# Altium PCB m_airconditionerV2.0_PCB.PcbDoc
Units mm, origin at the board's own origin, x right, y up, seen from the top; angles counter-clockwise.
Board outline 200.13 x 180.13 mm, 2 copper layers (Top Layer, Bottom Layer); 81 components, 122 nets, 456 pads, 39 vias.
Unrouted connection lines stored in the file: 132.
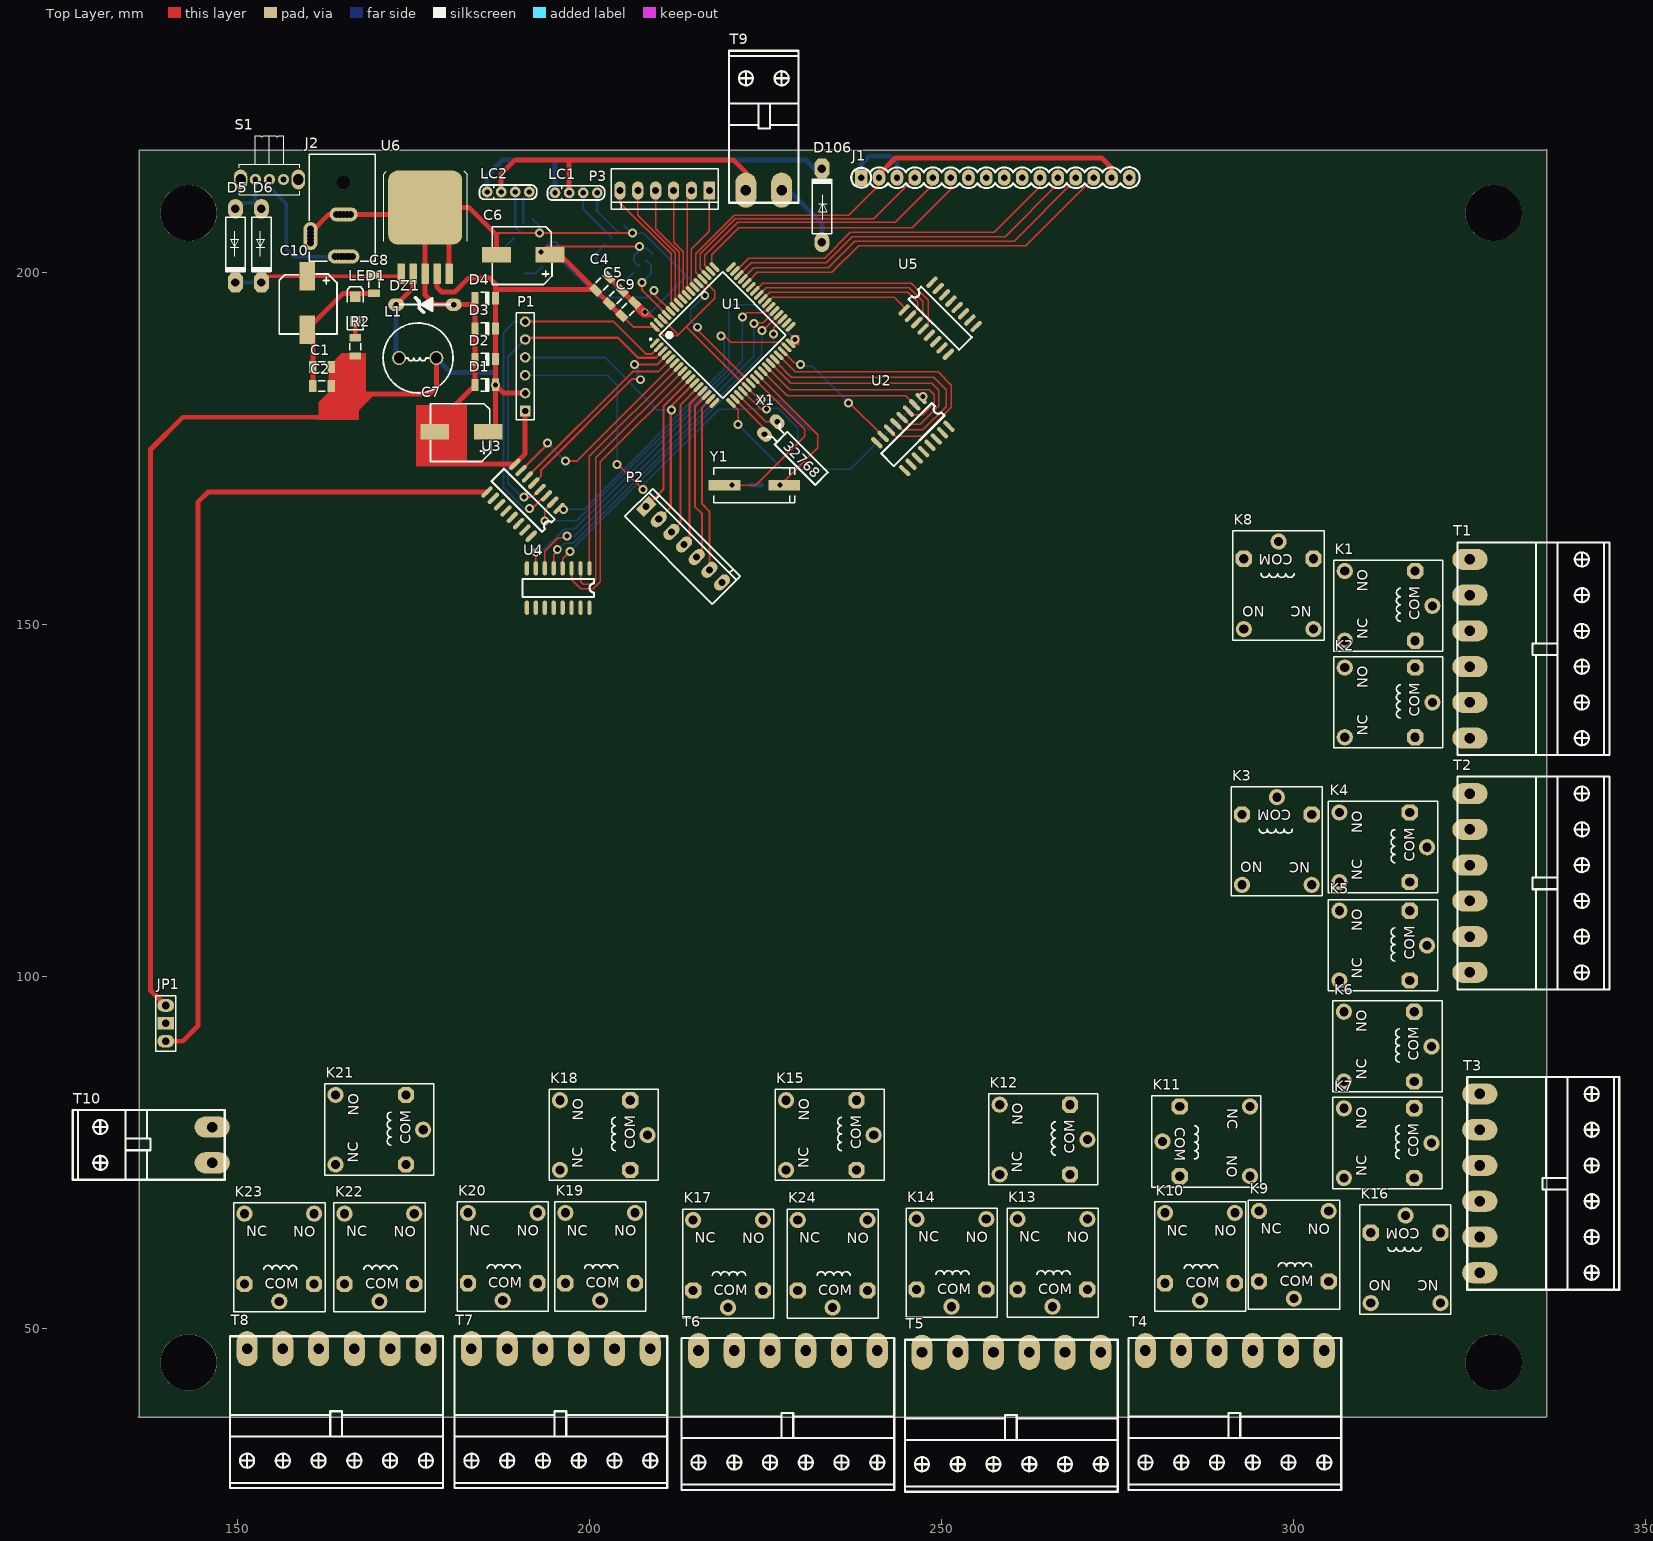
[diagram p0: Top Layer view]
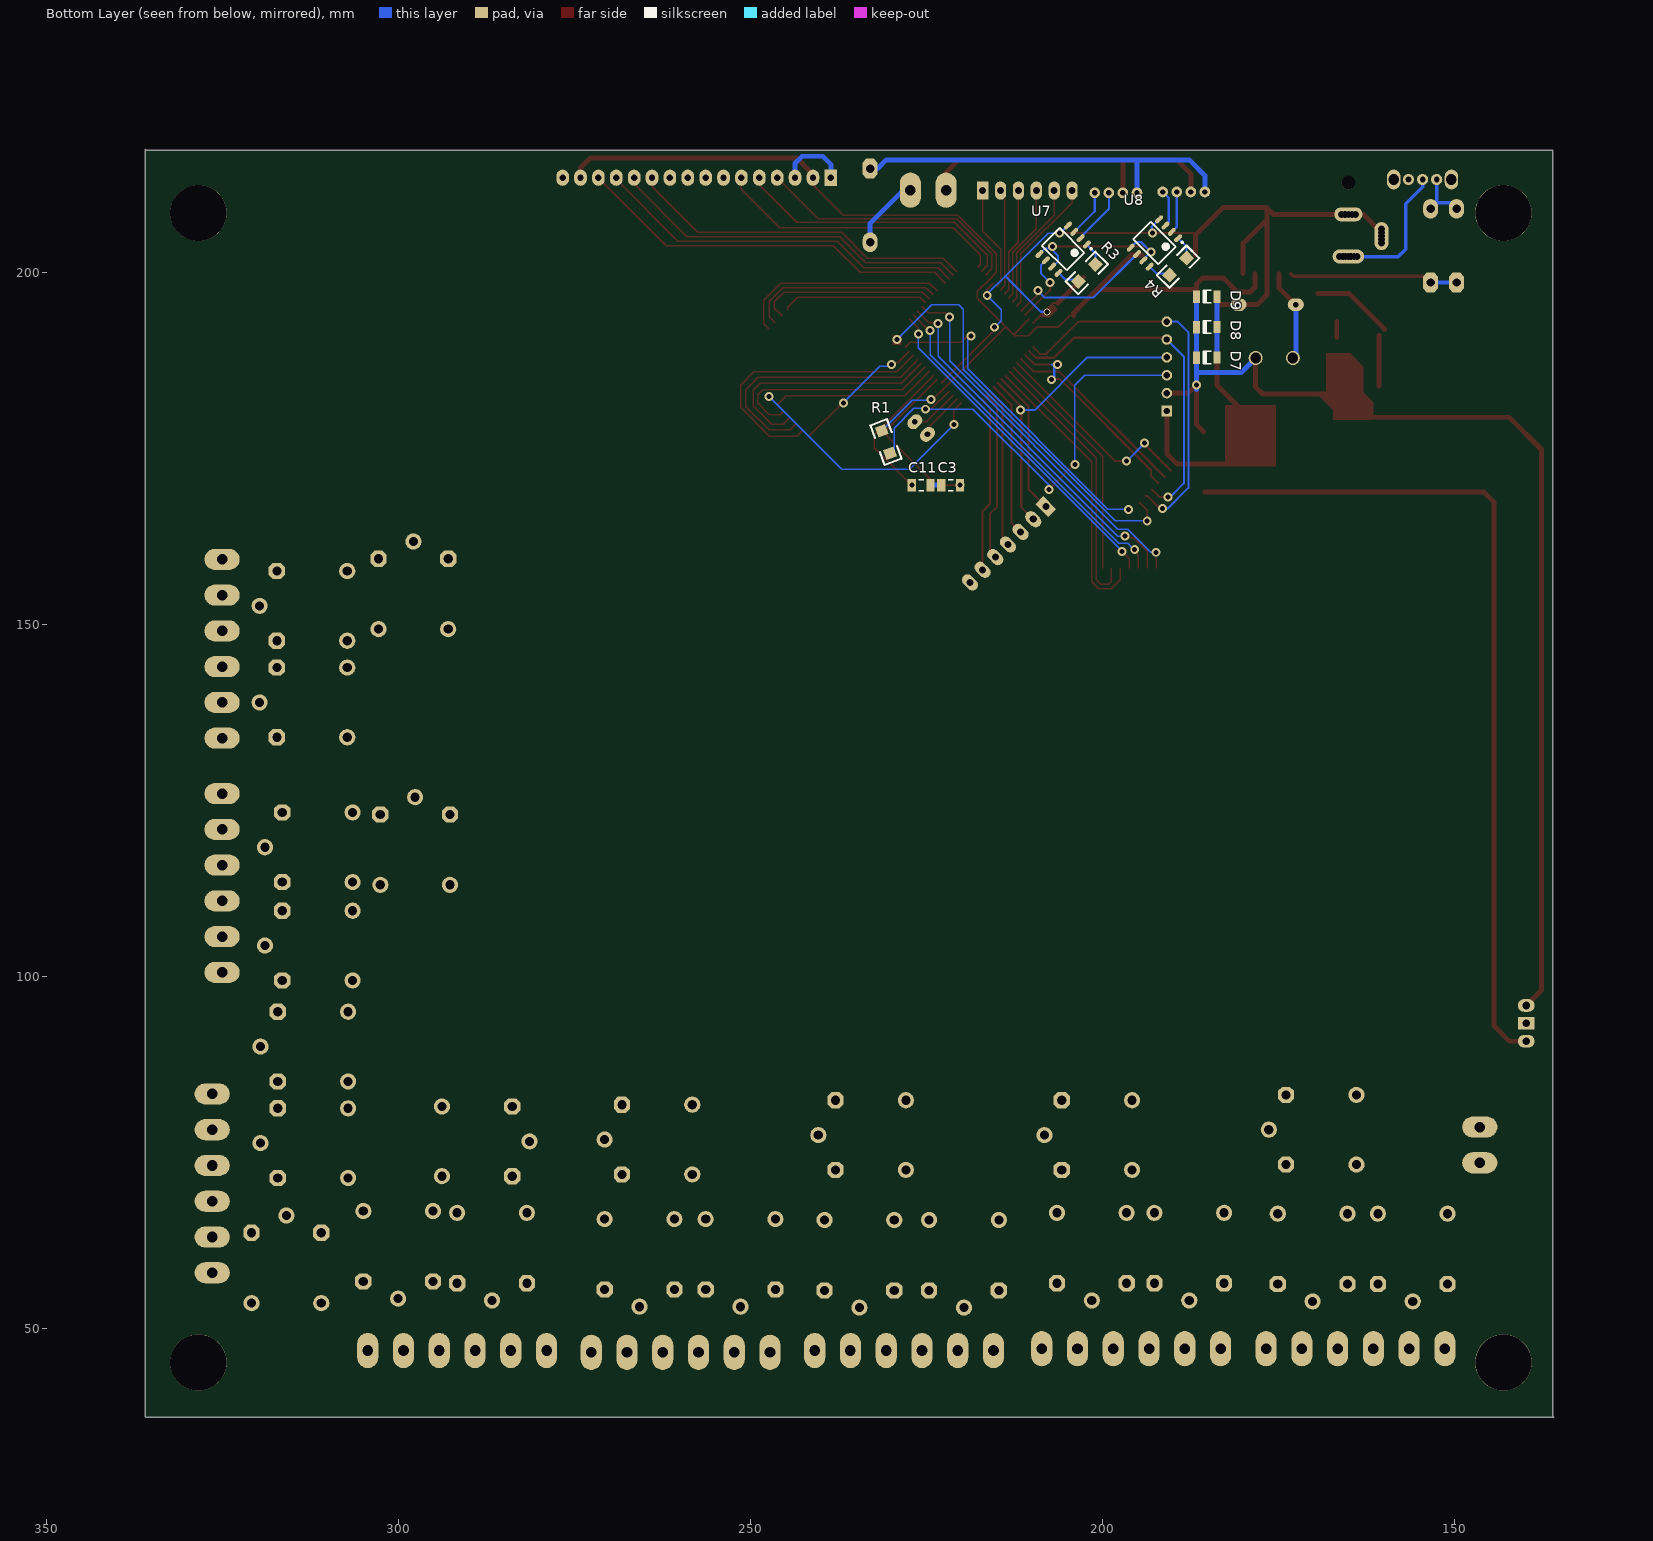
[diagram p1: Bottom Layer view, seen from below]

## Layer stack, top to bottom
Top Solder: solder mask 0.0102, Solder Resist, Dk 3.5
Top Layer: signal copper 0.0356
Dielectric 1: dielectric 0.32, FR-4, Dk 4.8
Bottom Layer: signal copper 0.0356
Bottom Solder: solder mask 0.0102, Solder Resist, Dk 3.5

## Board outline
136.031,37.504 135.897,37.37 335.897,37.37 336.031,37.504 336.031,217.504 335.897,217.37 136.031,217.37

## Design rules (kind name [scope] priority, off if disabled: settings)
Clearance [All] p1: gap=0.254
PolygonConnect [All] p1: connectstyle=Relief reliefconductorwidth=0.254 reliefentries=4 polygonreliefangle="90 Angle" airgapwidth=0.254
RoutingVias [All] p1: holewidth=0.711 width=1.27 viastyle="Through Hole" minholewidth=0.711 minwidth=1.27 maxholewidth=0.711 maxwidth=1.27
SolderMaskExpansion [All] p1: expansion=0.102
Width [All] p1: maxlimit=0.7 minlimit=0.2 preferedwidth=0.5
29 further rules are at their usual default settings.

## Components (designator, comment, footprint, x,y, rotation, side; value= is the part's Value field where it differs from the comment)
C1 "100nF" SMD_CAP_1206 163.322,186.563 r180 top
C2 "150nf" SMD_CAP_1206 163.322,183.896 r180 top
C3 "100nF" "CAP 1206 (3216X15L)" 221.615,169.799 r180 bottom
C4 "100nF" SMD_CAP_1206 200.914,197.485 r45 top
C5 "100nF" SMD_CAP_1206 202.819,195.58 r45 top
C6 "Capacitor Polarized" "Electrolytic Capacitor SMD Dia-8" 194.31,202.819 r180 top
C7 "Capacitor Polarized" "Electrolytic Capacitor SMD Dia-8" 185.547,177.673 r180 top
C8 "100nF" SMD_CAP_1206 169.418,199.644 r270 top
C9 "1000uF" SMD_CAP_1206 204.597,193.871 r45 top
C10 "Capacitor Polarized" "Electrolytic Capacitor SMD Dia-8" 159.639,199.39 r270 top
C11 "100nF" "CAP 1206 (3216X15L)" 225.806,169.799 r0 bottom
D1 "Diode Zener SMD" DIOMELF3615N 185.166,184.023 r180 top
D2 "Diode Zener SMD" DIOMELF3615N 185.166,187.706 r180 top
D3 "Diode Zener SMD" DIOMELF3615N 185.166,192.024 r180 top
D4 "Diode Zener SMD" DIOMELF3615N 185.166,196.342 r180 top
D5 "1N4007" My_DO-41 149.987,198.374 r90 top
D6 "1N4007" My_DO-41 153.67,198.374 r90 top
D7 "Diode Zener SMD" DIOMELF3615N 185.166,187.96 r180 bottom
D8 "Diode Zener SMD" DIOMELF3615N 185.166,192.278 r180 bottom
D9 "Diode Zener SMD" DIOMELF3615N 185.166,196.596 r180 bottom
D106 "1N4007" My_DO-41 232.791,215.011 r270 top
DZ1 "1n5822" ZENER 180.721,195.453 r180 top
J1 "SIP16" SIP16 238.633,213.487 r0 top
J2 "Power Jack" "Power Jack" 165.1,216.789 r270 top
JP1 "Jumper" "jumper selector" 139.827,90.805 r90 top
K1 "Relay" "Relay 15.40x12.10x13.10" 319.786,152.654 r90 top
K2 "Relay" "Relay 15.40x12.10x13.10" 319.786,138.938 r90 top
K3 "Relay" "Relay 15.40x12.10x13.10" 297.688,125.476 r180 top
K4 "Relay" "Relay 15.40x12.10x13.10" 319.024,118.364 r90 top
K5 "Relay" "Relay 15.40x12.10x13.10" 319.024,104.394 r90 top
K6 "Relay" "Relay 15.40x12.10x13.10" 319.659,90.043 r90 top
K7 "Relay" "Relay 15.40x12.10x13.10" 319.659,76.327 r90 top
K8 "Relay" "Relay 15.40x12.10x13.10" 297.942,161.798 r180 top
K9 "Relay" "Relay 15.40x12.10x13.10" 300.101,54.229 r0 top
K10 "Relay" "Relay 15.40x12.10x13.10" 286.766,53.975 r0 top
K11 "Relay" "Relay 15.40x12.10x13.10" 281.432,76.581 r270 top
K12 "Relay" "Relay 15.40x12.10x13.10" 270.764,76.835 r90 top
K13 "Relay" "Relay 15.40x12.10x13.10" 265.811,53.086 r0 top
K14 "Relay" "Relay 15.40x12.10x13.10" 251.46,53.086 r0 top
K15 "Relay" "Relay 15.40x12.10x13.10" 240.411,77.47 r90 top
K16 "Relay" "Relay 15.40x12.10x13.10" 315.976,66.04 r180 top
K17 "Relay" "Relay 15.40x12.10x13.10" 219.71,52.959 r0 top
K18 "Relay" "Relay 15.40x12.10x13.10" 208.28,77.47 r90 top
K19 "Relay" "Relay 15.40x12.10x13.10" 201.549,53.975 r0 top
K20 "Relay" "Relay 15.40x12.10x13.10" 187.706,53.975 r0 top
K21 "Relay" "Relay 15.40x12.10x13.10" 176.403,78.232 r90 top
K22 "Relay" "Relay 15.40x12.10x13.10" 170.18,53.848 r0 top
K23 "Relay" "Relay 15.40x12.10x13.10" 155.956,53.848 r0 top
K24 "Relay" "Relay 15.40x12.10x13.10" 234.569,52.959 r0 top
L1 "100uh" "General 10x12(200m) Inductor" 171.577,187.071 r270 top
LC1 "LoadCell-SUP" LoadCell-SUP 199.136,210.439 r0 top
LC2 "LoadCell-SUP" LoadCell-SUP 189.484,210.566 r0 top
LED1 "Red" "LED SMD 1206" 166.751,194.818 r90 top
P1 "Programmer" HDR1X6 190.881,180.34 r90 top
P2 "LHWR" "Polarized Header 7" 213.741,161.671 r315 top
P3 "LHWR" "Polarized Header 6" 210.693,211.455 r180 top
R1 "RES" 1206 231.394,177.546 r250 bottom
R2 "125" "RES 1206 (3216X08L)" 166.751,190.754 r270 top
R3 "RES" 1206 201.041,201.168 r315 bottom
R4 "RES" 1206 188.087,202.057 r315 bottom
S1 "Switch SPDT_Subminiator" "SPDT Subminiator" 154.559,213.233 r0 top
T1 "PHONIX6" PHONIX6 325.12,159.258 r270 top
T2 "PHONIX6" PHONIX6 325.12,125.984 r270 top
T3 "PHONIX6" PHONIX6 326.517,83.312 r270 top
T4 "PHONIX6" PHONIX6 304.419,46.863 r180 top
T5 "PHONIX6" PHONIX6 272.669,46.609 r180 top
T6 "PHONIX6" PHONIX6 240.919,46.863 r180 top
T7 "PHONIX6" PHONIX6 208.661,47.117 r180 top
T8 "PHONIX6" PHONIX6 176.784,47.117 r180 top
T9 "PHONIX2" PHONIX2 227.33,211.709 r0 top
T10 "PHONIX2" PHONIX2 146.431,78.613 r90 top
U1 "ATmega64-16AC" 64A_N 218.948,191.135 r45 top
U2 "ULN2003" SO-16 247.142,182.118 r315 top
U3 "ULN2003" SO-16 195.707,166.497 r225 top
U4 "ULN2003" SO-16 200.025,157.988 r270 top
U5 "ULN2003" SO-16 244.729,194.691 r45 top
U6 "Adjustable" TO-263-5 176.657,205.867 r0 top
U7 "*AD604" AD620-Soic 205.613,203.327 r315 bottom
U8 "*AD604" AD620-Soic 192.659,204.216 r315 bottom
X1 "XTAL" XTAL2 226.695,178.816 r225 top
Y1 "11.0592 MHz" "Crystal SMD" 224.028,169.799 r180 top

## Footprints (in the part's own frame and the unit in brackets; to place one, negate y for a bottom-side part, rotate by r counter-clockwise, add the part's x,y. Pads: shape width x height; smd on the part's side, far side on the other; paste and mask are expansions set on the pad)
64A_N [mm] "Thin QFP, 64-Leads, Body 14x14mm, Pitch 0.8mm, IPC Medium Density"
  oval 1.75x0.55 smd: 1(-7.65,6) 2(-7.65,5.2) 3(-7.65,4.4) 4(-7.65,3.6) 5(-7.65,2.8) 6(-7.65,2) 7(-7.65,1.2) 8(-7.65,0.4) 9(-7.65,-0.4) 10(-7.65,-1.2) 11(-7.65,-2) 12(-7.65,-2.8) 13(-7.65,-3.6) 14(-7.65,-4.4) 15(-7.65,-5.2) 16(-7.65,-6) 33(7.65,-6) 34(7.65,-5.2) 35(7.65,-4.4) 36(7.65,-3.6) 37(7.65,-2.8) 38(7.65,-2) 39(7.65,-1.2) 40(7.65,-0.4) 41(7.65,0.4) 42(7.65,1.2) 43(7.65,2) 44(7.65,2.8) 45(7.65,3.6) 46(7.65,4.4) 47(7.65,5.2) 48(7.65,6)
  oval 0.55x1.75 smd: 17(-6,-7.65) 18(-5.2,-7.65) 19(-4.4,-7.65) 20(-3.6,-7.65) 21(-2.8,-7.65) 22(-2,-7.65) 23(-1.2,-7.65) 24(-0.4,-7.65) 25(0.4,-7.65) 26(1.2,-7.65) 27(2,-7.65) 28(2.8,-7.65) 29(3.6,-7.65) 30(4.4,-7.65) 31(5.2,-7.65) 32(6,-7.65) 49(6,7.65) 50(5.2,7.65) 51(4.4,7.65) 52(3.6,7.65) 53(2.8,7.65) 54(2,7.65) 55(1.2,7.65) 56(0.4,7.65) 57(-0.4,7.65) 58(-1.2,7.65) 59(-2,7.65) 60(-2.8,7.65) 61(-3.6,7.65) 62(-4.4,7.65) 63(-5.2,7.65) 64(-6,7.65)
  silkscreen extent -7.77,-6.35 6.35,6.95, body extent -7,-7 7,7, height 1.2
1206 [mil]
  rect 60x60 smd: 1(0,0) 2(135,0)
  silkscreen extent -50,-50 185,50
AD620-Soic [mm] "SOIC, 8-Leads, Body 4.90x3.90mm, Pitch 1.27mm, IPC Medium Density"
  oval 1.35x0.6 smd: 1(-2.85,1.905) 2(-2.85,0.635) 3(-2.85,-0.635) 4(-2.85,-1.905) 5(2.85,-1.905) 6(2.85,-0.635) 7(2.85,0.635) 8(2.85,1.905)
  silkscreen extent -2.97,-2.5 1.77,2.88, body extent -2,-2.5 2,2.5, height 1.75
"CAP 1206 (3216X15L)" [mm] "Chip Capacitor, 2-Leads, Body 3.2x1.6mm, IPC High Density"
  rect 1.15x1.75 smd: 1(-1.325,0) 2(1.325,0)
  silkscreen extent -0.35,-0.77 0.35,0.77, body extent -1.6,-0.8 1.6,0.8, height 1
"Crystal SMD" [mm]
  rect 4.5x1.5 smd: 1(-3.683,0) 2(4.817,0)
  silkscreen extent -5.18,-2.5 6.32,2.5, body extent -5.64,-2.25 6.66,2.25, height 5.18
DIOMELF3615N [mm] "MELF Diode, 2-Leads, Body 3.6x1.5mm, IPC Medium Density"
  rect 1x1.75 smd: 1(-1.495,-0.03) 2(1.38,-0.005)
  silkscreen extent -0.55,-0.87 0.55,0.87, body extent -1.61,-0.83 1.54,0.67, height 1.45
"Electrolytic Capacitor SMD Dia-8" [mm] "470uf,6.3v,16v"
  rect 4.1x2.2 smd: 1(-0.1,0.3) 2(7.5,0.3)
  silkscreen extent -0.4,-3.7 8.1,4.5, body extent -0.6,-3.7 8.4,4.6, height 11.9
"General 10x12(200m) Inductor" [mm]
  round 2 hole 1.5: 0(-0.8,6.7) 1(-0.8,1.4)
  silkscreen extent -5.77,-0.87 4.17,9.06, body extent -5.87,-1 4.13,9, height 11.63
HDR1X6 [mm] "Connector; Header; 6 Position"
  rect 1.5x1.5 hole 0.9: 1(0,0)
  round 1.5 hole 0.9: 2(2.54,0) 3(5.08,0) 4(7.62,0) 5(10.16,0) 6(12.7,0)
  silkscreen extent -1.27,-1.27 13.97,1.27
"jumper selector" [mm]
  oval 1.8x2.4 hole 1.1: 1(0,0) 3(5.08,0)
  rect 1.8x2.4 hole 1.1: 2(2.54,0)
  silkscreen extent -1.4,-1.4 6.48,1.4, body extent -1.24,-1.27 6.38,1.27, height 10.16
"LED SMD 1206" [mm]
  rect 1.5x1.5 smd: 1(-1.75,0) 2(1.75,0)
  silkscreen extent -2.9,-1.15 3.2,1.15, body extent -1.65,-0.76 1.65,0.69, height 1.36
LoadCell-SUP [mil]
  round 60 hole 30: 1(-157.48,35.43) 2(-78.74,35.43) 3(0,35.43) 4(78.74,35.43)
  silkscreen extent -200,-5 120,75
My_DO-41 [mil]
  oval 110x85 hole 47.24: A(420.71,10)
  oct 110x85 hole 47.24: K(8.9,10)
  silkscreen extent 64,-45 375,65
PHONIX2 [mm]
  oval 3x5 hole 1.5: 1(0,0) 2(-5.08,0)
  silkscreen extent -7.49,-1.78 2.41,19.81
PHONIX6 [mm]
  oval 3x5 hole 1.5: 1(0,0) 2(5.08,0) 3(10.16,0) 4(15.24,0) 5(20.32,0) 6(25.4,0)
  silkscreen extent -2.41,-1.78 27.81,19.81
"Polarized Header 6" [mm]
  rect 1.6x2.6 hole 1: 1(-6.36,-0.205)
  oval 1.6x2.6 hole 1: 2(-3.82,-0.205) 3(-1.28,-0.205) 4(1.26,-0.205) 5(3.8,-0.205) 6(6.34,-0.205)
  silkscreen extent -7.6,-3.3 7.6,2.42, body extent -7.62,-3.32 7.62,2.48, height 10.75
"Polarized Header 7" [mm]
  rect 1.6x2.6 hole 1: 1(-7.605,-0.405)
  oval 1.6x2.6 hole 1: 2(-5.065,-0.405) 3(-2.525,-0.405) 4(0.015,-0.405) 5(2.555,-0.405) 6(5.095,-0.405) 7(7.635,-0.405)
  silkscreen extent -8.75,-3.53 8.85,2.07, body extent -8.84,-3.62 8.94,2.17, height 10.75
"Power Jack" [mm] "Power Adaptor Jack"
  round 1.5 hole 1: 1(14.5,-1.25) 1(14.5,-0.8) 1(14.5,-0.4) 1(14.5,0.4) 1(14.5,0.8) 1(14.5,1.25) 2(8.5,-1) 2(8.5,1) 2(8.5,-0.5) 2(8.5,0.5) 3(10.6,-4.7) 3(11.1,-4.7) 3(12.1,-4.7) 3(12.6,-4.7)
  oval 2x4.5 hole 1: 1(14.5,0)
  oval 2x4 hole 1: 2(8.5,0)
  oval 4x2 hole 1: 3(11.6,-4.7)
  round 1.9 hole 2: MH(4,0)
  silkscreen extent 0,-4.9 15.2,4.5, body extent 0,-4.9 15.2,4.5, height 11
"Relay 15.40x12.10x13.10" [mm]
  round 2.3 hole 1.3: 1(0,0) 2(-4.95,12.45) 3(4.95,12.45)
  oct 2.3x2.3 hole 1.3: 4(-4.95,2.45) 5(4.95,2.45)
  silkscreen extent -6.45,-1.5 6.5,14, body extent -6.05,-1.3 6.05,14, height 15.6
"RES 1206 (3216X08L)" [mm] "Chip Resistor, 2-Leads, Body 3.2x1.6mm, IPC High Density _ (0.125 W)"
  rect 1.05x1.7 smd: 1(0,0) 2(2.596,0)
  silkscreen extent 0.8,-0.75 1.8,0.75, body extent -0.23,-0.76 2.82,0.76, height 0.6
SIP16 [mm]
  rect 1.8x2.3 hole 0.9: 1(0,0)
  oval 1.8x2.3 hole 0.9: 2(2.54,0) 3(5.08,0) 4(7.62,0) 5(10.16,0) 6(12.7,0) 7(15.24,0) 8(17.78,0) 9(20.32,0) 10(22.86,0) 11(25.4,0) 12(27.94,0) 13(30.48,0) 14(33.02,0) 15(35.56,0) 16(38.1,0)
  silkscreen extent -1.42,-1.48 39.56,1.5
SMD_CAP_1206 [mm]
  rect 1.05x1.7 smd: 1(0,0) 2(2.596,0)
  silkscreen extent 0.8,-0.75 1.8,0.75, body extent -0.22,-0.77 2.82,0.75, height 0.75
SO-16 [mil]
  oval 80x24 smd: 1(0,0) 2(0,-50) 3(0,-100) 4(0,-150) 5(0,-200) 6(0,-250) 7(0,-300) 8(0,-350) 9(220,-350) 10(220,-300) 11(220,-250) 12(220,-200) 13(220,-150) 14(220,-100) 15(220,-50) 16(220,0)
  silkscreen extent 60,-375 160,25
"SPDT Subminiator" [mm] "Subminiator SPDT switch"
  round 1.6 hole 0.8: 1(2,0) 2(0,0) 3(-2,0)
  oval 1.9x2.8 hole 1.5: M2(-4.1,0) M2(4.1,0)
  silkscreen extent -4.3,-2.2 4.3,6.2, body extent -4.31,-2.28 4.3,6.09, height 4.7
TO-263-5 [mm] "LM2576"
  round 0.5 on Mech15: 0(0.025,0.125)
  rrect25% 1.05x2.95 smd: 1(-3.385,-6.025) 2(-1.68,-6.025) 3(0.025,-6.025) 4(1.73,-6.025) 5(3.435,-6.025)
  rrect25% 10.5x10.5 smd: 3(0.025,3.375)
  silkscreen extent -5.88,-1.38 6.02,8.62, body extent -5.06,-6.6 5.1,7.41, height 4.56
XTAL2 [mm]
  oval 1.7x2.3 hole 0.8: 1(0,0) 2(2.54,0)
  silkscreen extent 0,0.51 2.54,10.16
ZENER [mm]
  oval 2.3x1.8 hole 0.8: 1(0,0) 2(8.153,0)
  silkscreen extent 0.53,-0.97 7.65,1.07

## Part data
C1 C2 C3 C4 C5 C8 C9 C11: library part Cap-Bipolar, "Bipolar Capacitor"
D1: "5.3v"
D5 D6 D106: "1 Amp Diode"
DZ1: library part ZENER
JP1: library part "Jumper Selector", "Jumper Selector"
K1 K2 K3 K4 K5 K6 K7 K8 K9 K10 K11 K12 K13 K14 K15 K16 K17 K18 K19 K20 K21 K22 K23 K24: "SPDT Relay"
L1: library part Inductor
LED1: library part LED, "LED"
P1: library part "Header 6", "Header, 6-Pin"
P2: library part "7pin LHWR"
P3: library part "6pin LHWR"
R2: library part Resistor, "Resistor"
S1: "Subminiator SPDT Switch"
U1: "8-Bit AVR Microcontroller with 64K Bytes of In-System Programmable Flash Memory"
U6: library part LM2576HVS, "Switching Voltage Regulator IC, TO-263-5 SMD, LM2591HVS-5.0"
U7 U8: library part AD620, "Instrumental Amplifire"
Y1: library part XTAL, "XTAL Crystal"

## Free pads (board coordinates)
  round 8 hole 8: 1(143.074,208.479) 1(143.074,45.168) 1(328.488,45.168) 1(328.488,208.479)

## Via types
v1: diameter 1.27, hole 0.711, Top Layer to Bottom Layer, 38 vias
v2: diameter 1, hole 0.7, Top Layer to Bottom Layer, 1 vias

## Nets (pads, with @x,y where several pads share a name; then routed paths per layer and width w, separated by ;. In a path a pad name is that pad's centre, name@x,y a point inside that pad or via, vN(x,y) a via of type N, cw(c..) or ccw(c..) an arc to the next point about the centre after c; other vN are vias at no path point)
+12: JP1.1 U2.9 U3.9 U4.9 U5.9 | length 121.6
  Top Layer w0.7: JP1.1 142.24,90.805 144.399,92.964 144.399,167.386 145.845,168.832 U3.9
ADC1: U1.61 U7.6 | length 10
  Top Layer w0.3: v1(207.518,198.628) 207.518,197.474 U1.61
  Bottom Layer w0.3: v1(207.518,198.628) 208.788,199.898 208.788,201.05 U7.6
ADC2: U1.60 U8.6 | length 21
  Top Layer w0.3: v1(209.169,197.485) 209.169,196.954 U1.60
  Bottom Layer w0.3: U8.6 201.295,196.478 208.289,196.478 209.169,197.358 v1(209.169,197.485)
ADC3: P3.6 U1.59 | length 19.7
  Top Layer w0.2: P3.6 204.353,209.941 211.637,202.657 211.637,195.86 212.124,195.372 U1.59
ADC4: P3.5 U1.58 | length 18.4
  Top Layer w0.2: P3.5 206.893,208.143 212.203,202.833 212.203,196.425 212.69,195.938 U1.58
ADC5: P3.4 U1.57 | length 17
  Top Layer w0.2: P3.4 209.433,206.245 212.768,202.91 212.768,196.991 213.256,196.503 U1.57
ADC6: P3.3 U1.56 | length 15.6
  Top Layer w0.2: P3.3 211.973,204.347 213.334,202.986 213.334,197.557 213.821,197.069 U1.56
ADC7: P3.2 U1.55 | length 14.7
  Top Layer w0.2: U1.55 214.387,197.635 213.9,198.122 213.9,211.047 P3.2
ADC8: P3.1 U1.54 | length 15
  Top Layer w0.2: U1.54 214.953,198.2 214.465,198.688 214.465,203.289 217.053,205.877 P3.1
BACKLIGHT: J1.16 U2.16
CONTROL1: U1.25 U2.2 | length 23.6
  Top Layer w0.2: U1.25 228.15,182.499 244.965,182.499 U2.2
CONTROL2: U1.26 U2.3 | length 31.2
  Top Layer w0.2: U1.26 225.287,186.574 228.473,183.388 248.285,183.388 249.047,182.626 249.047,181.483 247.396,179.832 245.836,179.832 U2.3
CONTROL3: U1.27 U2.4 | length 34.5
  Top Layer w0.2: U1.27 228.6,184.311 248.632,184.311 249.682,183.261 249.682,181.102 247.015,178.435 245.364,178.435 244.448,179.351 U2.4
CONTROL4: U1.28 U2.5 | length 37.5
  Top Layer w0.2: U1.28 226.337,187.556 228.727,185.166 248.92,185.166 250.698,183.388 250.698,180.975 247.396,177.673 244.403,177.673 U2.5
CONTROL5: U1.29 U2.6 | length 40.3
  Top Layer w0.2: U1.29 229.246,185.928 249.555,185.928 251.46,184.023 251.46,180.848 247.396,176.784 243.496,176.784 U2.6
CONTROL6: U1.30 U2.7 | length 19.8
  Top Layer w0.2: U1.30 229.108,187.198 229.743,187.198 v1(229.997,186.944) ; v1(236.855,181.483) 236.855,181.591 236.874,181.61 U2.7
  Bottom Layer w0.2: v1(229.997,186.944) 229.997,186.817 229.87,186.69 231.648,186.69 v1(236.855,181.483)
CONTROL7: U1.31 U3.1 | length 46.3
  Top Layer w0.2: v1(218.694,191.008) 219.202,191.008 220.091,190.119 227.318,190.119 U1.31
  Bottom Layer w0.2: v1(196.342,166.37) 199.256,166.37 219.202,186.316 219.202,190.627 218.694,191.135 v1(218.694,191.008)
CONTROL8: U1.32 U3.2 | length 59.3
  Top Layer w0.2: v1(193.675,164.719) 193.675,166.261 U3.2 ; U1.32 228.703,189.968 v1(229.235,190.5)
  Bottom Layer w0.2: v1(193.675,164.719) 198.247,164.719 219.837,186.309 219.837,194.818 220.472,195.453 224.282,195.453 v1(229.235,190.5)
CONTROL9: P1.6 U1.2 U3.3 | length 55.1
  Top Layer w0.3: P1.6 203.454,193.04 208.026,188.468 208.927,188.468 U1.2 ; v1(191.516,166.497) 191.77,166.751 192.151,166.751 193.693,168.293 U3.3
  Bottom Layer w0.3: P1.6 189.357,193.04 187.833,191.516 187.833,169.418 190.754,166.497 v1(191.516,166.497)
CONTROL10: P1.5 U1.3 U3.4 | length 48.4
  Top Layer w0.3: v1(190.754,168.148) 191.97,168.148 U3.4 ; P1.5 191.135,190.754 204.089,190.754 206.929,187.914 209.504,187.914 U1.3
  Bottom Layer w0.3: v1(190.754,168.148) 190.373,168.148 188.468,170.053 188.468,188.087 P1.5
CONTROL11: U1.4 U3.5 | length 30.3
  Top Layer w0.3: U3.5 193.167,171.141 193.167,171.958 206.121,184.912 207.264,184.912 v1(207.264,184.785) ; v1(206.407,186.967) 209.689,186.967 U1.4
  Bottom Layer w0.3: v1(206.407,186.967) 207.241,186.967 206.883,186.609 206.883,185.166 v1(207.264,184.785)
CONTROL12: U1.5 U3.6 | length 27.3
  Top Layer w0.3: U3.6 206.158,185.928 209.781,185.928 U1.5
CONTROL13: U1.6 U3.7 | length 30.3
  Top Layer w0.3: U3.7 194.056,175.622 v1(194.056,175.768) ; v1(196.596,173.228) 198.213,173.228 U1.6
  Bottom Layer w0.3: v1(194.056,175.768) v1(196.596,173.228)
CONTROL14: U1.7 U4.1 | length 33.8
  Top Layer w0.2: U4.1 200.025,173.909 U1.7
CONTROL15: U1.8 U4.2 | length 39.3
  Top Layer w0.2: U4.2 198.755,156.083 199.136,155.702 200.279,155.702 200.914,156.337 200.914,173.667 U1.8
CONTROL16: U1.9 U4.3 | length 41
  Top Layer w0.2: U4.3 197.485,156.337 198.755,155.067 200.533,155.067 201.549,156.083 201.549,173.101 U1.9@213.821,185.373
CONTROL17: U1.35 U4.4 | length 48.4
  Top Layer w0.2: U4.4 196.215,159.385 v1(197.231,160.401) ; v1(226.187,191.262) 226.187,192.151 U1.35
  Bottom Layer w0.2: v1(197.231,160.401) 226.187,189.357 v1(226.187,191.262)
CONTROL18: U1.36 U4.5 | length 50.1
  Top Layer w0.2: U4.5 194.945,159.893 195.453,160.401 v1(195.453,160.655) ; v1(224.536,191.77) 224.674,191.77 U1.36
  Bottom Layer w0.2: v1(195.453,160.655) 195.58,160.655 196.469,161.544 197.732,161.544 224.536,188.348 v1(224.536,191.77)
CONTROL19: U1.37 U4.6 | length 52
  Top Layer w0.2: U4.6 193.675,160.401 195.58,162.306 196.596,162.306 v1(196.85,162.56) ; v1(223.393,192.786) 223.52,192.913 224.686,192.913 U1.37
  Bottom Layer w0.2: v1(196.85,162.56) 197.866,162.56 223.393,188.087 v1(223.393,192.786)
CONTROL20: U1.38 U4.7 | length 53.7
  Top Layer w0.2: U4.7 v1(192.405,160.274) ; v1(221.742,193.675) 222.377,194.31 224.79,194.31 225.61,195.13 U1.38
  Bottom Layer w0.2: v1(192.405,160.274) 193.165,160.274 196.44,163.549 197.839,163.549 221.742,187.452 v1(221.742,193.675)
CONTROL21: U1.39 U5.1 | length 20.8
  Top Layer w0.2: U1.39 225.979,196.469 243.332,196.469 244.729,195.072 U5.1
CONTROL22: U1.40 U5.2 | length 25.4
  Top Layer w0.2: U1.40 225.61,197.231 245.237,197.231 246.634,195.834 246.634,194.945 245.627,193.938 U5.2
CONTROL23: U1.41 U5.3 | length 28
  Top Layer w0.2: U1.41 225.113,197.866 245.491,197.866 247.396,195.961 247.396,193.766 U5.3
CONTROL24: U1.42 U5.4 | length 30.5
  Top Layer w0.2: U1.42 224.617,198.501 245.745,198.501 248.158,196.088 248.158,192.732 U5.4
FAZ: K1.3 K2.3 K3.3 K4.3 K5.3 K6.3 K7.3 K8.3 K9.3 K10.3 K11.3 K12.3 K13.3 K14.3 K15.3 K16.3 K17.3 K18.3 K19.3 K20.3 K21.3 K22.3 K23.3 K24.3 T10.2
GND: C1.2 C2.2 C3.1 C4.2 C5.2 C6.2 C7.2 C8.2 C9.2 C10.2 C11.1 D1.2 D2.2 D3.2 D4.2 D7.2 D8.2 D9.2 DZ1.1 J1.1 J1.3 J2.2 J2.3 LED1.2 P1.1 P2.7 U1.22 U1.53 U1.63 U2.8 U3.8 U4.8 U5.8 U6.3 U6.5 U7.4 U8.4 | length 216.3
  Top Layer w0.2: v1(215.358,192.244) 215.011,192.244 U1.22 ; U1.53 216.408,197.635 v1(216.408,196.723)
  Top Layer w0.3: 187.057,205.613 v1(192.913,205.613) v1(206.121,205.613) ; C9.2 207.022,195.707 U1.63
  Top Layer w0.7: C10.2 159.939,191.943 165.044,197.048 C8.2 ; J2.3@160.4,205.689 163,208.289 164.1,208.289 165.1,208.289 166.1,208.289 175.729,208.289 U6.3@176.682,209.242 ; C2.2 C1.2 C10.2@160.726,191.103 ; DZ1.1@180.092,195.205 179.844,195.453 178.054,195.453 176.682,196.825 176.682,199.842 U6.3@176.682,207.493 ; U6.5 180.092,204.083 U6.3@176.682,207.493 ; DZ1.1 183.659,195.453 183.786,195.326 D3.2 D2.2 D1.2 178.047,178.289 C7.2 182.637,172.783 U3.8 190.881,174.243 P1.1 ; C6.2 186.81,205.366 182.934,209.242 U6.3@176.682,209.242 ; C4.2 C5.2 C9.2@206.363,195.707 ; U6.3@176.682,207.493 U6.3@176.682,209.242
  Bottom Layer w0.2: v1(206.121,205.613) 207.772,205.613 213.868,199.517 216.408,196.977 v1(216.408,196.723) 214.434,194.749 214.434,193.167 v1(215.358,192.244)
  Bottom Layer w0.3: U8.4 193.04,206.529 193.04,205.613 v1(192.913,205.613) ; U7.4 206.021,205.613 v1(206.121,205.613) ; v2(207.899,194.437) 208.788,194.437 213.868,199.517
  Bottom Layer w0.7: D7.2 D8.2 D9.2 ; C3.1 C11.1 ; J1.1 238.633,215.392 239.776,216.535 242.697,216.535 243.713,215.519 J1.3
LCD_BRIGHTNESS: U1.17 U2.1 | length 36.7
  Top Layer w0.2: U1.17 221.131,180.467 221.131,178.459 v1(221.107,178.435)
  Bottom Layer w0.2: v1(221.107,178.435) 227.457,172.085 237.109,172.085 v1(247.396,182.372)
MF1: K8.1 T1.1
MF2: K1.1 T1.3
MF3: K2.1 T1.5
MF4: K3.1 T2.1
MF5: K4.1 T2.3
MF6: K5.1 T2.5
MF7: K6.1 T3.1
MF8: K7.1 T3.3
MF9: K16.1 T3.5
MF10: K9.1 T4.1
MF11: K10.1 T4.3
MF12: K11.1 T4.5
MF13: K12.1 T5.1
MF14: K13.1 T5.3
MF15: K14.1 T5.5
MF16: K15.1 T6.1
MF17: K24.1 T6.3
MF18: K17.1 T6.5
MF19: K18.1 T7.1
MF20: K19.1 T7.3
MF21: K20.1 T7.5
MF22: K21.1 T8.1
MF23: K22.1 T8.3
MF24: K23.1 T8.5
MN1: T1.2 T1.4 T1.6 T2.2 T2.4 T2.6 T3.2 T3.4 T3.6 T4.2 T4.4 T4.6 T5.2 T5.4 T5.6 T6.2 T6.4 T6.6 T7.2 T7.4 T7.6 T8.2 T8.4 T8.6 T10.1
NetC3_2: C3.2 U1.23 Y1.2 | length 24.3
  Top Layer w0.2: v1(220.29,169.799) 223.647,169.799 230.632,176.784 230.632,177.754 U1.23
NetC8_1: C8.1 C10.1 D5.K D6.K U6.1 | length 24.1
  Top Layer w0.5: D6.K 154.306,199.49 C10.1 172.92,199.49 U6.1
  Bottom Layer w0.5: D5.K D6.K
NetC11_2: C11.2 U1.24 Y1.1 | length 21.3
  Top Layer w0.2: U1.24 224.075,185.373 232.465,176.983 232.465,175.133 v1(227.131,169.799)
NetD5_A: D5.A D6.A S1.3 | length 5.3
  Bottom Layer w0.5: D5.A@150.59,209.917 152.559,209.917 S1.3
NetD106_A: D106.A T9.1 | length 10.3
  Bottom Layer w0.7: T9.1 228.346,211.709 233.045,207.01 D106.A
NetD106_K: D106.K LC1.1 LC2.1 | length 55.8
  Bottom Layer w0.7: LC2.1 185.484,213.805 187.706,216.027 230.759,216.027 232.001,214.785 D106.K ; LC1.1 195.136,215.837
NetDZ1_2: DZ1.2 L1.1 U6.2 | length 13.1
  Top Layer w0.7: DZ1.2 174.977,197.862 U6.2
  Bottom Layer w0.7: DZ1.2 172.568,188.28 L1.1
NetJ1_4: J1.4 U1.51 | length 38.3
  Top Layer w0.2: U1.51 215.773,200.533 215.773,202.685 220.733,207.645 240.411,207.645 J1.4
NetJ1_5: J1.5 U1.50 | length 40.1
  Top Layer w0.2: U1.50 216.408,201.029 216.408,202.438 221.107,207.137 243.459,207.137 248.793,212.471 J1.5
NetJ1_6: J1.6 U1.49 | length 41.3
  Top Layer w0.2: U1.49 217.424,201.144 217.424,202.565 221.234,206.375 245.872,206.375 251.333,211.836 J1.6
NetJ1_11: J1.11 U1.47 | length 49.6
  Top Layer w0.2: U1.47 220.795,200.221 222.631,202.057 233.426,202.057 237.109,205.74 257.556,205.74 264.033,212.217 J1.11
NetJ1_12: J1.12 U1.46 | length 50.7
  Top Layer w0.2: U1.46 223.012,201.422 233.68,201.422 237.363,205.105 259.08,205.105 J1.12@266.573,212.598
NetJ1_13: J1.13 U1.45 | length 53.4
  Top Layer w0.2: U1.45 223.382,200.66 233.934,200.66 237.744,204.47 260.35,204.47 269.113,213.233 J1.13
NetJ1_14: J1.14 U1.44 | length 55.5
  Top Layer w0.2: U1.44 223.878,200.025 234.442,200.025 238.252,203.835 262.001,203.835 J1.14
NetJ2_1: J2.1 S1.2 | length 19.1
  Bottom Layer w0.5: S1.2 154.559,212.217 156.972,209.804 156.972,203.327 158.01,202.289 163.85,202.289 164.3,202.289 J2.1@164.7,202.289
NetLC1_2: LC1.2 LC2.2 T9.2 | length 46.1
  Top Layer w0.7: LC2.2 187.484,214.027 189.484,216.027 220.472,216.027 222.25,214.249 T9.2 ; LC1.2 197.136,215.995
NetLC1_3: LC1.3 U7.2 | length 8.1
  Bottom Layer w0.3: LC1.3 199.136,209.042 203.149,205.029 U7.2
NetLC1_4: LC1.4 U7.3 | length 6.8
  Bottom Layer w0.3: LC1.4 201.136,208.702 U7.3
NetLC2_3: LC2.3 U8.2 | length 6
  Bottom Layer w0.3: LC2.3 189.484,206.493 U8.2
NetLC2_4: LC2.4 U8.3 | length 4.7
  Bottom Layer w0.3: U8.3@190.627,207.146 190.627,210.609 LC2.4
NetLED1_1: LED1.1 R2.1 | length 2.3
  Top Layer w0.7: R2.1 LED1.1
NetR3_1: R3.1 U7.1 | length 3.3
  Bottom Layer w0.3: R3.1 201.041,202.786 U7.1
NetR3_2: R3.2 U7.8 | length 2.9
  Bottom Layer w0.3: R3.2@203.765,199.042 205.359,199.042 U7.8
NetR4_1: R4.1 U8.1 | length 3.3
  Bottom Layer w0.3: R4.1 188.087,203.675 U8.1
NetR4_2: R4.2 U8.8 | length 2.9
  Bottom Layer w0.3: R4.2@190.777,199.898 192.372,199.898 U8.8
NetU1_18: U1.18 X1.2 | length 6.8
  Top Layer w0.2: U1.18 224.899,177.83 X1.2
NetU1_19: U1.19 X1.1 | length 7
  Top Layer w0.2: U1.19 225.044,178.816 X1.1
"RELAY ANODE": JP1.2 K1.4 K2.4 K3.4 K4.4 K5.4 K6.4 K7.4 K8.4 K9.4 K10.4 K11.4 K12.4 K13.4 K14.4 K15.4 K16.4 K17.4 K18.4 K19.4 K20.4 K21.4 K22.4 K23.4 K24.4
RES: P1.3 R1.2 U1.20 | length 67.2
  Top Layer w0.2: v1(203.962,172.72) 204.089,172.72 v1(207.645,169.164) ; U1.20 221.823,183.18 224.409,180.594 v1(225.171,180.594)
  Bottom Layer w0.2: P1.3 202.565,185.42 203.962,184.023 v1(203.962,172.72) ; v1(207.645,169.164) 207.391,169.418 207.391,169.545 218.44,180.594 v1(225.171,180.594) 225.044,180.721 226.822,180.721 229.616,177.927 229.616,174.929 R1.2
SCK: P1.4 P2.2 U1.11 | length 45.7
  Top Layer w0.3: P2.2 211.582,166.675 211.582,180.975 214.918,184.311 U1.11
  Bottom Layer w0.3: P1.4 202.184,187.96 209.677,180.467 211.455,180.467 v1@211.836,180.086
  other v1: 211.709,180.467
STIM1: K8.5 U2.15
STIM2: K1.5 U2.14
STIM3: K2.5 U2.13
STIM4: K3.5 U2.12
STIM5: K4.5 U2.11
STIM6: K5.5 U2.10
STIM7: K6.5 U3.16
STIM8: K7.5 U3.15
STIM9: K16.5 U3.14
STIM10: K9.5 U3.13
STIM11: K10.5 U3.12
STIM12: K11.5 U3.11
STIM13: K12.5 U3.10
STIM14: K13.5 U4.16
STIM15: K14.5 U4.15
STIM16: K15.5 U4.14
STIM17: K24.5 U4.13
STIM18: K17.5 U4.12
STIM19: K18.5 U4.11
STIM20: K19.5 U4.10
STIM21: K20.5 U5.16
STIM22: K21.5 U5.15
STIM23: K22.5 U5.14
STIM24: K23.5 U5.13
SW1: P2.1 U1.10 | length 20.7
  Top Layer w0.3: P2.1 210.566,169.251 210.566,181.056 U1.10
SW3: P2.3 U1.12 | length 22.2
  Top Layer w0.3: P2.3 212.979,164.48 212.979,181.229 215.496,183.746 U1.12
SW4: P2.4 U1.13 | length 21.8
  Top Layer w0.3: P2.4@214.249,162.158 214.249,181.345 U1.13
SW5: P2.5 U1.14 | length 24.5
  Top Layer w0.3: P2.5 216.027,160.344 216.027,165.735 215.011,166.751 215.011,180.975 U1.14
SW6: P2.6 U1.15 | length 25.2
  Top Layer w0.3: P2.6 217.057,166.102 216.027,167.132 216.027,180.86 U1.15
VCC: C1.1 C2.1 C4.1 C5.1 C6.1 C7.1 C9.1 D1.1 D2.1 D3.1 D4.1 D7.1 D8.1 D9.1 J1.2 J1.15 JP1.3 L1.0 P1.2 R1.1 R2.2 U1.21 U1.52 U1.62 U1.64 U6.4 U7.5 U7.7 U8.5 U8.7 | length 367.8
  Top Layer w0.2: U1.64 210.59,191.008 212.471,191.008 212.662,191.199 ; U1.62 212.662,191.199 ; 213.793,192.33 U1.21 224.133,181.99 v1(224.412,181.99) ; J1.2@241.173,212.471 236.855,208.153 220.599,208.153 215.138,202.692 215.138,200.036 U1.52 217.805,197.369 217.805,196.342 212.662,191.199
  Top Layer w0.3: v1(193.167,202.946) 193.929,203.708 v1(207.137,203.708) ; C9.1@204.702,193.871 206.272,192.302 U1.64
  Top Layer w0.7: JP1.3 137.668,98.044 137.668,174.879 142.24,179.451 161.544,179.451 163.322,181.229 C2.1 ; R2.2 164.917,188.158 C1.1 C2.1 ; L1.0 178.277,183.738 177.292,182.753 164.465,182.753 C2.1 ; U6.4 178.387,197.914 179.07,197.231 180.848,197.231 182.88,199.263 185.801,199.263 186.661,198.403 186.661,197.612 ; C7.1 186.661,178.387 D1.1 ; P1.2 187.834,182.88 D1.1 ; C6.1 195.88,202.519 C4.1@200.787,197.612 ; C9.1@204.147,193.871 204.147,194.252 C5.1 C4.1 C4.1@200.787,197.612 ; J1.2 241.173,213.995 243.459,216.281 272.796,216.281 274.193,214.884 J1.15 ; D1.1 D2.1 D3.1 D4.1 186.661,197.612 ; 186.661,197.612 C4.1@200.787,197.612
  Bottom Layer w0.2: v1(224.412,181.99) 224.538,181.864 227.076,181.864 R1.1
  Bottom Layer w0.3: U8.7 194.225,201.888 v1(193.167,202.946) 194.564,204.343 195.226,204.343 U8.5 ; U7.7@207.179,200.999 206.925,200.999 206.375,201.549 206.375,202.438 207.391,203.454 208.153,203.454 208.948,202.659 U7.5
  Bottom Layer w0.7: L1.0 180.347,185.801 186.661,185.801 ; 186.661,183.388 D7.1 D8.1 D9.1
  other v1: 186.661,184.023
pads on no net: J1.7 J1.8 J1.9 J1.10 J2.MH K1.2 K2.2 K3.2 K4.2 K5.2 K6.2 K7.2 K8.2 K9.2 K10.2 K11.2 K12.2 K13.2 K14.2 K15.2 K16.2 K17.2 K18.2 K19.2 K20.2 K21.2 K22.2 K23.2 K24.2 S1.1 S1.M2 U1.1 U1.16 U1.33 U1.34 U1.43 U1.48 U5.5 U5.6 U5.7 U5.10 U5.11 U5.12 U6.0

## Other copper
Top Layer:
  rectangle net CONTROL8: 228.6,189.738 229.87,191.135
  rectangle net GND: 175.387,172.466 182.626,181.229
  rectangle net VCC: 163.195,183.007 164.338,186.944
  rectangle net VCC: 163.957,182.499 165.354,187.706
  rectangle net VCC: 164.719,182.499 168.275,188.595
  region net VCC: 169.545,182.753 167.259,180.467 167.259,179.07 161.671,179.07 161.544,179.197 161.544,181.61 163.258,183.325 164.401,183.325 164.973,182.753
  region net GND: 208.788,193.675 207.518,193.675 206.502,194.691 206.502,194.945 207.01,195.453 207.137,195.453 208.788,193.802

## Text inside footprints (layer, text, board x,y; h text height)
K1: Top Overlay "NC" at 310.566,147.93 h1.5 r90; Top Overlay "NO" at 310.617,154.661 h1.5 r90; Top Overlay "COM" at 318.008,150.622 h1.5 r90
K2: Top Overlay "NC" at 310.566,134.214 h1.5 r90; Top Overlay "NO" at 310.617,140.945 h1.5 r90; Top Overlay "COM" at 318.008,136.906 h1.5 r90
K3: Top Overlay "NC" at 302.412,116.256 h1.5 r180; Top Overlay "NO" at 295.681,116.307 h1.5 r180; Top Overlay "COM" at 299.72,123.698 h1.5 r180
K4: Top Overlay "NC" at 309.804,113.64 h1.5 r90; Top Overlay "NO" at 309.855,120.371 h1.5 r90; Top Overlay "COM" at 317.246,116.332 h1.5 r90
K5: Top Overlay "NC" at 309.804,99.67 h1.5 r90; Top Overlay "NO" at 309.855,106.401 h1.5 r90; Top Overlay "COM" at 317.246,102.362 h1.5 r90
K6: Top Overlay "NC" at 310.439,85.319 h1.5 r90; Top Overlay "NO" at 310.49,92.05 h1.5 r90; Top Overlay "COM" at 317.881,88.011 h1.5 r90
K7: Top Overlay "NC" at 310.439,71.603 h1.5 r90; Top Overlay "NO" at 310.49,78.334 h1.5 r90; Top Overlay "COM" at 317.881,74.295 h1.5 r90
K8: Top Overlay "NC" at 302.666,152.578 h1.5 r180; Top Overlay "NO" at 295.935,152.629 h1.5 r180; Top Overlay "COM" at 299.974,160.02 h1.5 r180
K9: Top Overlay "NC" at 295.377,63.449 h1.5; Top Overlay "NO" at 302.108,63.398 h1.5; Top Overlay "COM" at 298.069,56.007 h1.5
K10: Top Overlay "NC" at 282.042,63.195 h1.5; Top Overlay "NO" at 288.773,63.144 h1.5; Top Overlay "COM" at 284.734,55.753 h1.5
K11: Top Overlay "NC" at 290.652,81.305 h1.5 r270; Top Overlay "NO" at 290.601,74.574 h1.5 r270; Top Overlay "COM" at 283.21,78.613 h1.5 r270
K12: Top Overlay "NC" at 261.544,72.111 h1.5 r90; Top Overlay "NO" at 261.595,78.842 h1.5 r90; Top Overlay "COM" at 268.986,74.803 h1.5 r90
K13: Top Overlay "NC" at 261.087,62.306 h1.5; Top Overlay "NO" at 267.818,62.255 h1.5; Top Overlay "COM" at 263.779,54.864 h1.5
K14: Top Overlay "NC" at 246.736,62.306 h1.5; Top Overlay "NO" at 253.467,62.255 h1.5; Top Overlay "COM" at 249.428,54.864 h1.5
K15: Top Overlay "NC" at 231.191,72.746 h1.5 r90; Top Overlay "NO" at 231.242,79.477 h1.5 r90; Top Overlay "COM" at 238.633,75.438 h1.5 r90
K16: Top Overlay "NC" at 320.7,56.82 h1.5 r180; Top Overlay "NO" at 313.969,56.871 h1.5 r180; Top Overlay "COM" at 318.008,64.262 h1.5 r180
K17: Top Overlay "NC" at 214.986,62.179 h1.5; Top Overlay "NO" at 221.717,62.128 h1.5; Top Overlay "COM" at 217.678,54.737 h1.5
K18: Top Overlay "NC" at 199.06,72.746 h1.5 r90; Top Overlay "NO" at 199.111,79.477 h1.5 r90; Top Overlay "COM" at 206.502,75.438 h1.5 r90
K19: Top Overlay "NC" at 196.825,63.195 h1.5; Top Overlay "NO" at 203.556,63.144 h1.5; Top Overlay "COM" at 199.517,55.753 h1.5
K20: Top Overlay "NC" at 182.982,63.195 h1.5; Top Overlay "NO" at 189.713,63.144 h1.5; Top Overlay "COM" at 185.674,55.753 h1.5
K21: Top Overlay "NC" at 167.183,73.508 h1.5 r90; Top Overlay "NO" at 167.234,80.239 h1.5 r90; Top Overlay "COM" at 174.625,76.2 h1.5 r90
K22: Top Overlay "NC" at 165.456,63.068 h1.5; Top Overlay "NO" at 172.187,63.017 h1.5; Top Overlay "COM" at 168.148,55.626 h1.5
K23: Top Overlay "NC" at 151.232,63.068 h1.5; Top Overlay "NO" at 157.963,63.017 h1.5; Top Overlay "COM" at 153.924,55.626 h1.5
K24: Top Overlay "NC" at 229.845,62.179 h1.5; Top Overlay "NO" at 236.576,62.128 h1.5; Top Overlay "COM" at 232.537,54.737 h1.5
X1: Top Overlay "32768" at 227.413,175.224 h1.5 r315